# Altium PCB PCB_CardReader.pcbdoc
Units mil, origin at the board's own origin, x right, y up, seen from the top; angles counter-clockwise.
Board outline 4727.5 x 3025 mil, 2 copper layers (Top Layer, Bottom Layer); 25 components, 56 nets, 147 pads, 23 vias.
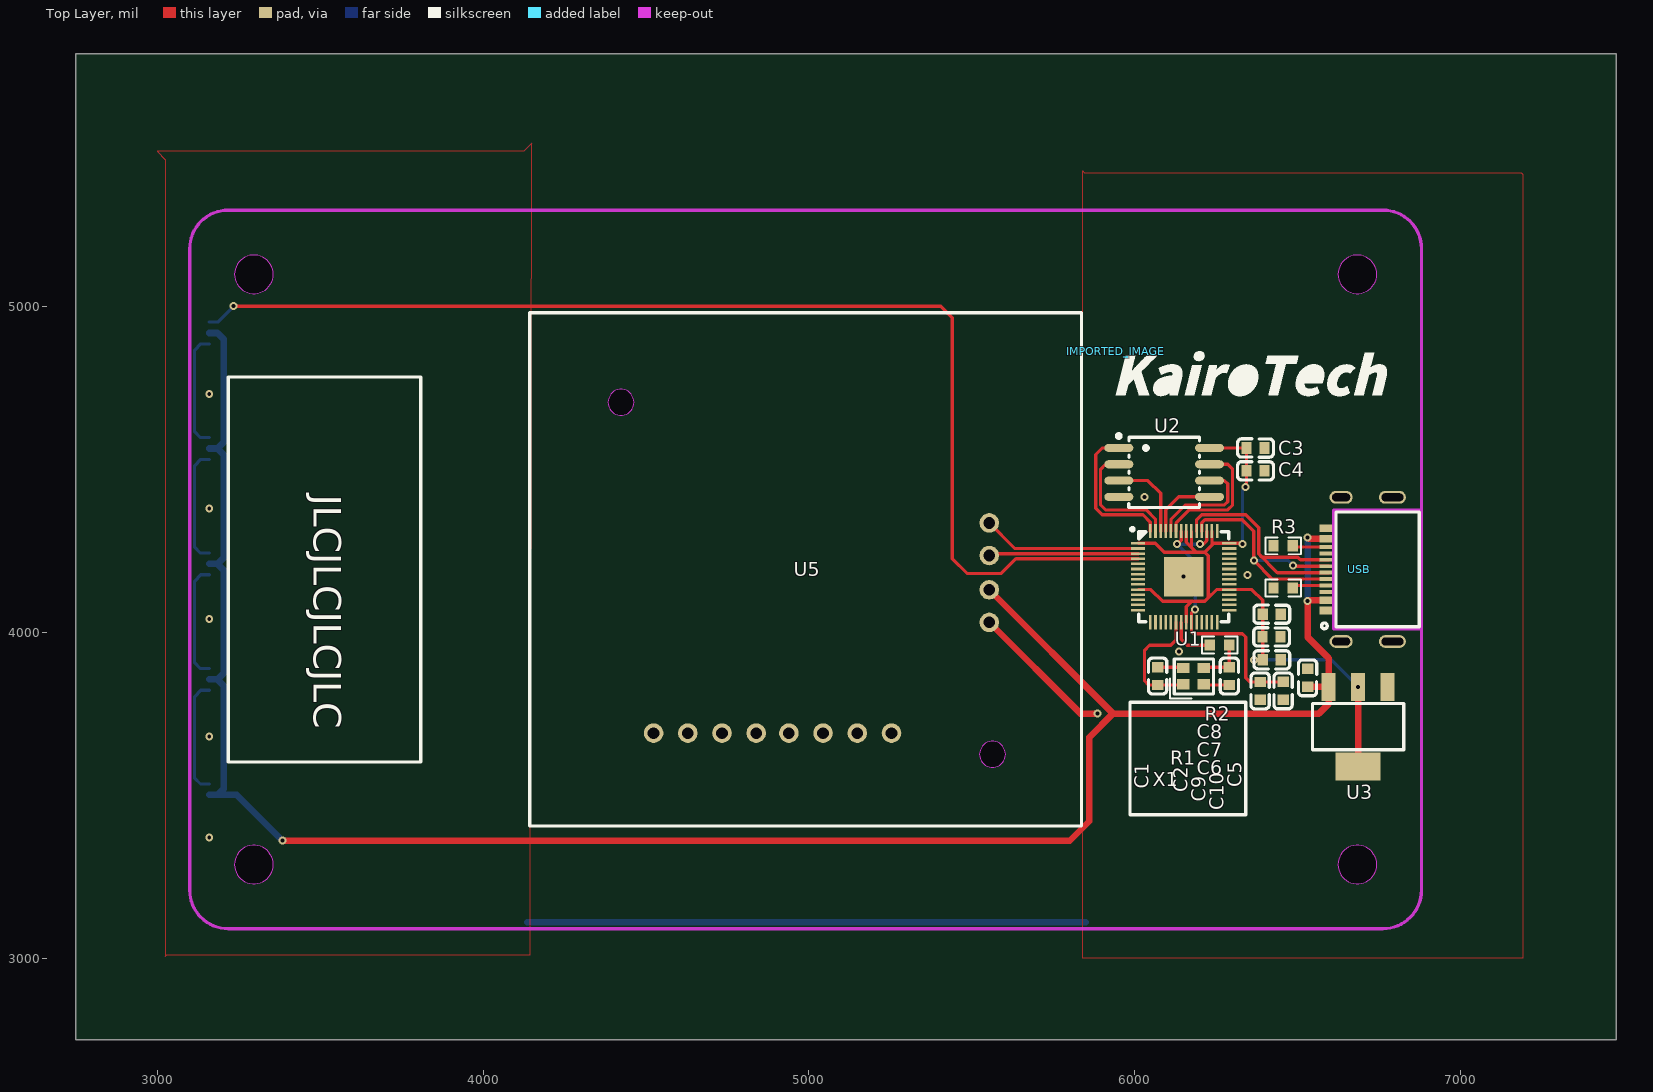
[diagram p0: Top Layer view]
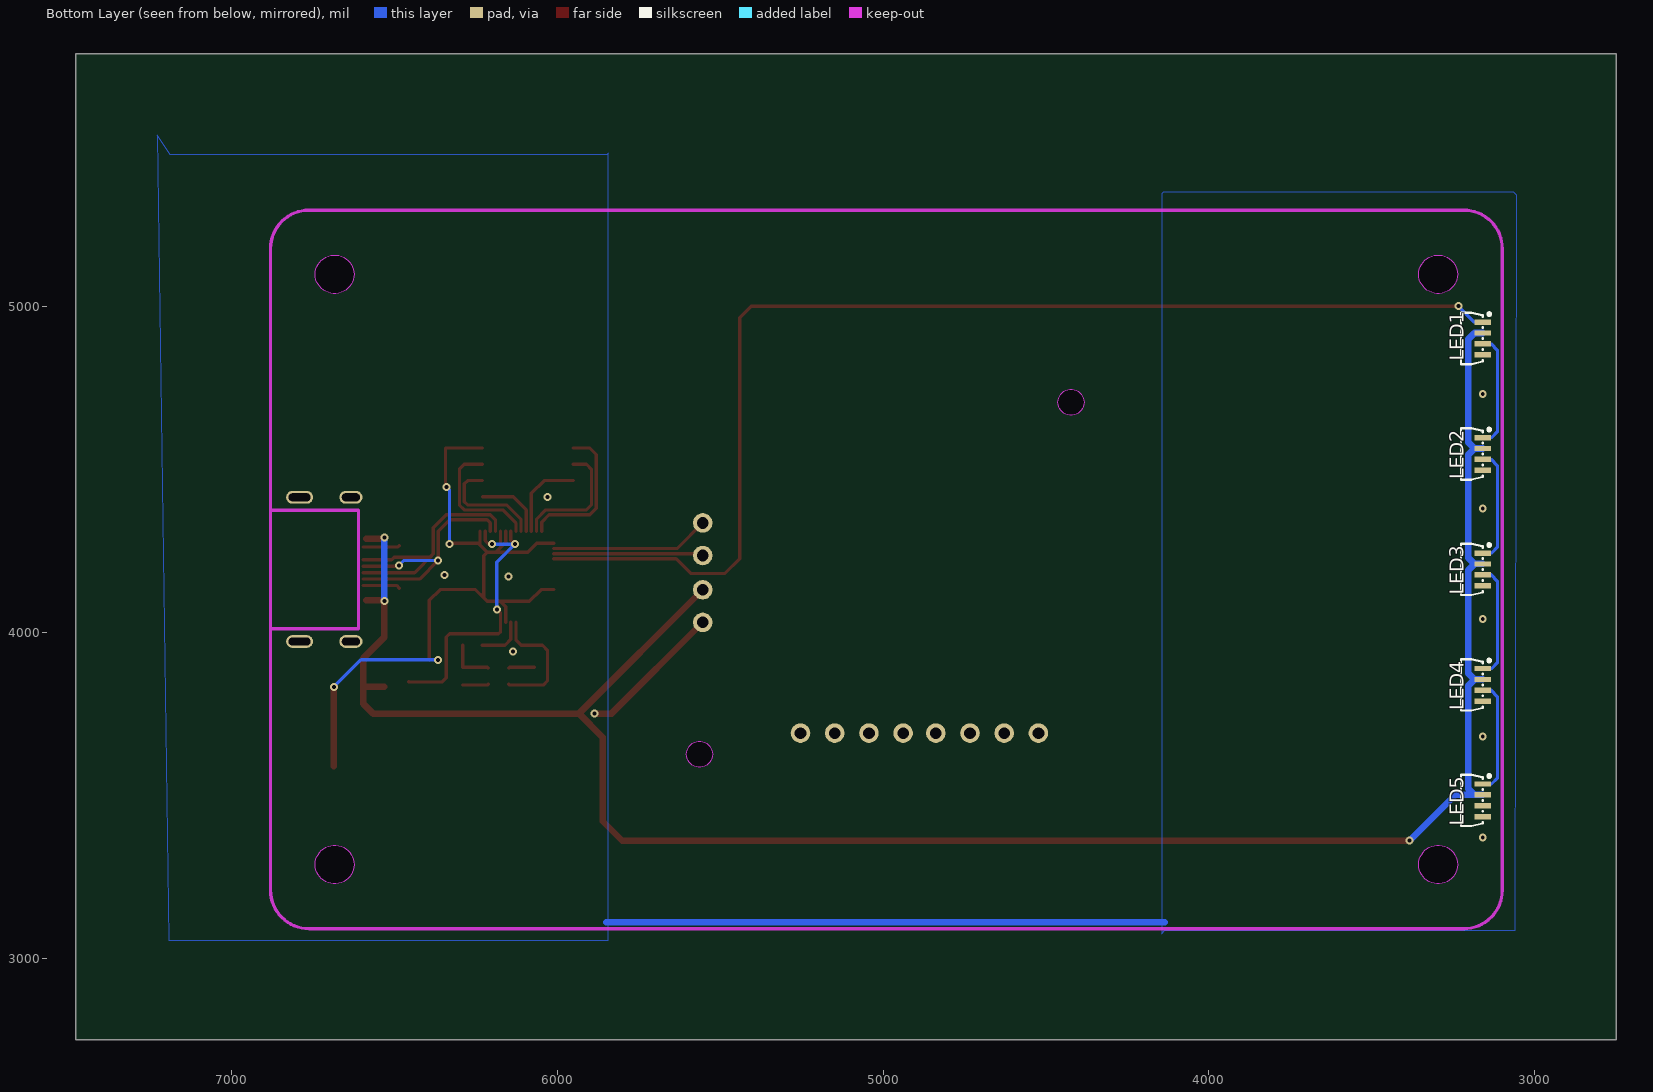
[diagram p1: Bottom Layer view, seen from below]

## Layer stack, top to bottom
Top Layer: signal copper (thickness not stored)
Dielectric: dielectric 12.6, FR-4, Dk 4.8
Bottom Layer: signal copper (thickness not stored)

## Board outline
7477.5,2750 2750,2750 2750,5775 7477.5,5775
cut-out: 3356.53,5097.87 ccw(c3296.85,5097.32) 3237.17,5097.87 ccw(c3296.85,5098.42)
cut-out: 6742.35,5097.87 ccw(c6682.67,5097.32) 6622.99,5097.87 ccw(c6682.67,5098.42)
cut-out: 3356.53,3286.85 ccw(c3296.85,3286.3) 3237.17,3286.85 ccw(c3296.85,3287.4)
cut-out: 6742.35,3286.85 ccw(c6682.67,3286.3) 6622.99,3286.85 ccw(c6682.67,3287.4)

## Components (designator, comment, footprint, x,y, rotation, side; value= is the part's Value field where it differs from the comment)
C1 "12pF" C0603 6070,3865 r270 top
C2 "12pF" C0603 6290,3865 r270 top
C3 "100nF" C0603 6370,4565 r180 top
C4 "100nF" C0603 6370,4495 r180 top
C5 "0.1u" C0603 6530,3860 r90 top
C6 "100nF" C0603 6420,3915 r180 top
C7 "100nF" C0603 6419.39,3985.21 r180 top
C8 "100nF" C0603 6420,4055 r180 top
C9 "100nF" C0603 6384.6,3819.7 r90 top
C10 "100nF" C0603 6455,3820 r90 top
IMPORTED_IMAGE "IMPORTED_IMAGE" IMPORTED_IMAGE 5942.04,4861.65 r0 top
LED1 "WS2812B-4020" LED-SMD_WS2812B-4020 3160,4901.02 r90 bottom
LED2 "WS2812B-4020" LED-SMD_WS2812B-4020 3160,4546.69 r90 bottom
LED3 "WS2812B-4020" LED-SMD_WS2812B-4020 3160,4192.36 r90 bottom
LED4 "WS2812B-4020" LED-SMD_WS2812B-4020 3160,3838.03 r90 bottom
LED5 "WS2812B-4020" LED-SMD_WS2812B-4020 3160,3483.7 r90 bottom
R1 "1k" R0603 6260,3960 r180 top
R2 "1k" R0603 6455,4135 r0 top
R3 "1k" R0603 6455,4265 r0 top
U1 "RP2040" LQFN-56_L7.0-W7.0-P0.4-EP 6150,4170 r0 top
U2 "W25Q32JVSSIQ_C2834491" SOIC-8_L5.2-W5.2-P1.27-LS7.9-BL 6090,4490 r270 top
U3 "AMS1117-5.0_C347223" SOT-223_L6.7-W3.5-P2.30-BR 6685,3710 r90 top
U5 "pn532" PN532 4143.3,3405 r0 top
USB "TYPE-610-1.6-T3" USB-C-SMD_TYPE-C-16P-610-1.6-T3 6687.95,4192.36 r90 top
X1 "12MHz" CRYSTAL-SMD_4P-L2.5-W2.0-BL_XTAL12MHZ 6180,3865 r0 top

## Footprints (in the part's own frame and the unit in brackets; to place one, negate y for a bottom-side part, rotate by r counter-clockwise, add the part's x,y. Pads: shape width x height; smd on the part's side, far side on the other; paste and mask are expansions set on the pad)
C0603 [mm]
  rect 0.8x0.9 smd: 1(-0.7,0) 2(0.7,0)
  silkscreen extent -1.41,-0.71 1.39,0.72
CRYSTAL-SMD_4P-L2.5-W2.0-BL_XTAL12MHZ [mm]
  rect 1x0.8 smd: 1(-0.8,-0.625) 2(0.8,-0.625) 3(0.8,0.625) 4(-0.8,0.625)
  silkscreen extent -1.82,-1.73 1.55,1.33
IMPORTED_IMAGE [mil]
  silkscreen extent 0,-138 832,0
LED-SMD_WS2812B-4020 [mm]
  rect 0.42x1.3 smd: 1(1.275,0) 2(0.425,0) 3(-0.425,0) 4(-1.275,0)
  silkscreen extent -2,-0.6 2,1.7
LQFN-56_L7.0-W7.0-P0.4-EP [mm]
  rect 1.1x0.2 smd: 1(-3.55,2.6) 2(-3.55,2.2) 3(-3.55,1.8) 4(-3.55,1.4) 5(-3.55,1) 6(-3.55,0.6) 7(-3.55,0.2) 8(-3.55,-0.2) 9(-3.55,-0.6) 10(-3.55,-1) 11(-3.55,-1.4) 12(-3.55,-1.8) 13(-3.55,-2.2) 14(-3.55,-2.6) 29(3.55,-2.6) 30(3.55,-2.2) 31(3.55,-1.8) 32(3.55,-1.4) 33(3.55,-1) 34(3.55,-0.6) 35(3.55,-0.2) 36(3.55,0.2) 37(3.55,0.6) 38(3.55,1) 39(3.55,1.4) 40(3.55,1.8) 41(3.55,2.2) 42(3.55,2.6)
  rect 0.2x1.1 smd: 15(-2.6,-3.55) 16(-2.2,-3.55) 17(-1.8,-3.55) 18(-1.4,-3.55) 19(-1,-3.55) 20(-0.6,-3.55) 21(-0.2,-3.55) 22(0.2,-3.55) 23(0.6,-3.55) 24(1,-3.55) 25(1.4,-3.55) 26(1.8,-3.55) 27(2.2,-3.55) 28(2.6,-3.55) 43(2.6,3.55) 44(2.2,3.55) 45(1.8,3.55) 46(1.4,3.55) 47(1,3.55) 48(0.6,3.55) 49(0.2,3.55) 50(-0.2,3.55) 51(-0.6,3.55) 52(-1,3.55) 53(-1.4,3.55) 54(-1.8,3.55) 55(-2.2,3.55) 56(-2.6,3.55)
  rect 3.1x3.1 smd: 57(0,0)
  silkscreen extent -4.13,-3.5 3.5,3.83
PN532 [mil]
  round 60 hole 36: 1(1410,930) 2(1410,830) 3(1410,725) 4(1410,625) 5(1110,285) 6(1005,285) 7(900,285) 8(795,285) 9(695,285) 10(590,285) 11(485,285) 12(380,285)
  Multi-Layer board cut-out: 1460,220 1456.04,237.36 1444.94,251.27 1428.9,259 1411.1,259 1395.06,251.27 1383.96,237.36 1380,220 1380,220 1383.96,202.64 1395.06,188.73 1411.1,181 1428.9,181 1444.94,188.73 1456.04,202.64 1460,220
  Multi-Layer board cut-out: 320,1300 316.04,1317.36 304.94,1331.27 288.9,1339 271.1,1339 255.06,1331.27 243.96,1317.36 240,1300 240,1300 243.96,1282.64 255.06,1268.73 271.1,1261 288.9,1261 304.94,1268.73 316.04,1282.64 320,1300
  Multi-Layer keep-out region: 1460,220 1456.04,237.36 1444.94,251.27 1428.9,259 1411.1,259 1395.06,251.27 1383.96,237.36 1380,220 1380,220 1383.96,202.64 1395.06,188.73 1411.1,181 1428.9,181 1444.94,188.73 1456.04,202.64 1460,220
  Multi-Layer keep-out region: 320,1300 316.04,1317.36 304.94,1331.27 288.9,1339 271.1,1339 255.06,1331.27 243.96,1317.36 240,1300 240,1300 243.96,1282.64 255.06,1268.73 271.1,1261 288.9,1261 304.94,1268.73 316.04,1282.64 320,1300
  silkscreen extent 0,0 1693,1575
R0603 [mil]
  rect 31.75x34.02 smd: 1(-29.66,0) 2(29.66,0)
  silkscreen extent -55,-26 55,26
SOIC-8_L5.2-W5.2-P1.27-LS7.9-BL [mm]
  oval 0.63x2.25 smd: 1(-1.905,-3.53) 2(-0.635,-3.53) 3(0.635,-3.53) 4(1.905,-3.53) 5(1.905,3.53) 6(0.635,3.53) 7(-0.635,3.53) 8(-1.905,3.53)
  silkscreen extent -2.99,-3.69 2.74,2.75
SOT-223_L6.7-W3.5-P2.30-BR [mm]
  rect 2.2x1.1 smd: 1(3.099,-2.3) 2(3.099,0) 3(3.099,2.3)
  rect 2.2x3.5 smd: 4(-3.099,0)
  silkscreen extent -1.8,-3.55 1.8,3.55
USB-C-SMD_TYPE-C-16P-610-1.6-T3 [mm]
  oval 1x2.1 hole 0.6 slot 1.7 at 90 deg: 0(5.62,-2.6) 2(-5.62,-2.6)
  oval 1x1.8 hole 0.6 slot 1.4 at 90 deg copper offset 0,0: 1(5.62,1.4) 3(-5.62,1.4)
  rect 0.6x1 smd: A1B12(-3.2,2.6) A4B9(-2.4,2.6) B1A12(3.2,2.6) B4A9(2.4,2.6)
  rect 0.3x1 smd: A5(-1.25,2.6) A6(-0.25,2.6) A7(0.25,2.6) A8(1.25,2.6) B5(1.75,2.6) B6(0.75,2.6) B7(-0.75,2.6) B8(-1.75,2.6)
  Board Outline Layer lines w0.254: -4.62,2 -4.62,-4.866 -4.62,2 ; -4.62,2 4.62,2 ; -4.62,2 4.62,2 ; 4.62,2 4.62,-4.782 4.62,2
  silkscreen extent -4.62,-4.7 4.47,2.92

## Via types
v1: diameter 24.41, hole 12.2, Top Layer to Bottom Layer, 23 vias

## Nets (pads, with @x,y where several pads share a name; then routed paths per layer and width w, separated by ;. In a path a pad name is that pad's centre, name@x,y a point inside that pad or via, vN(x,y) a via of type N, cw(c..) or ccw(c..) an arc to the next point about the centre after c; other vN are vias at no path point)
1V1: C9.2 C10.2 U1.23 U1.45 U1.50 | length 883.6
  Top Layer w10: v1(6130,4270) 6142.12,4282.12 U1.50 ; v1(6185,4070) 6173.62,4058.62 U1.23 6173.62,4001.38 6180,3995 6330,3995 6340,3985 6340,3860 6352.74,3847.26 C9.2 ; v1(6200,4270) 6210,4270 6220.86,4280.86 U1.45 ; C9.2 C10.2
  Bottom Layer w10: v1(6185,4070) 6185,4215 v1(6130,4270) v1(6200,4270)
3V3: C3.2 C4.2 C6.2 C7.2 C8.2 U1.1 U1.10 U1.22 U1.33 U1.42 U1.44 U1.48 U1.49 U2.8 U3.2 U3.4 | length 2402.1
  Top Layer w10: U1.10 6049.4,4130.6 6085,4095 6175,4095 ; U1.1 6062.6,4272.4 6090,4245 6215,4245 ; U1.22 6157.9,4077.9 6175,4095 ; U1.49 6157.9,4276.1 6189,4245 6173.6,4260.4 U1.48 ; U2.8 C3.2 C4.2 6342.45,4447.45 v1(6340,4445) ; U1.44 6236.61,4266.61 6215,4245 ; v1(6330,4270) 6327.64,4272.36 U1.42 6242.36,4272.36 6215,4245 ; C6.2 C8.2 6392.44,4097.56 6359.37,4130.63 U1.33 6250.63,4130.63 6225,4105 ; 6175,4095 6215,4095 6225,4105 ; 6215,4245 6225,4235 6225,4105
  Top Layer w20: U3.4 v1(6685,3832)
  Bottom Layer w10: v1(6330,4270) 6330,4435 v1(6340,4445) ; v1(6365,3915) 6602,3915 v1(6685,3832)
ADC_ACDD: U1.43
GND: C1.1 C2.2 C3.1 C4.1 C5.2 C6.1 C7.1 C8.1 C9.1 C10.1 LED1.4 LED2.4 LED3.4 LED4.4 LED5.4 R2.1 R3.1 U1.57 U2.4 U3.1 U5.4 USB.0 USB.1 USB.2 USB.3 USB.A1B12 USB.B1A12 X1.2 X1.4 | length 2322.1
  Top Layer w10: C1.1 6145.56,3892.55 X1.4 ; X1.2 6214.44,3837.44 C2.2
  Top Layer w20: U5.4 5833.3,3750 v1(5885,3750)
  Bottom Layer w20: 4135,3110 5850,3110
  other v1: 3160,3370 3160,3680 6135,3940 3160,4040 6150,4170 6345,4175 3160,4380 6030,4415 3160,4730
GPIO3: U1.5
GPIO4: U1.6
GPIO5: U1.7
GPIO6: U1.8
GPIO7: U1.9
GPIO8: U1.11
GPIO9: U1.12
GPIO10: U1.13
GPIO11: U1.14
GPIO12: U1.15
GPIO13: U1.16
GPIO14: U1.17
GPIO15: U1.18
GPIO16: U1.27
GPIO17: U1.28
GPIO18: U1.29
GPIO19: U1.30
GPIO20: U1.31
GPIO21: U1.32
GPIO22: U1.34
GPIO23: U1.35
GPIO24: U1.36
GPIO25: U1.37
GPIO26_ADC0: U1.38
GPIO27_ADC1: U1.39
GPIO28_ADC2: U1.40
GPIO29_ADC3: U1.41
LED: LED1.1 U1.4 | length 3662.2
  Top Layer w10: v1(3235,5000) 4680,5000 5405,5000 5440,4965 5440,4225 5485,4180 5500,4180 5590,4180 5635.1,4225.1 U1.4
  Bottom Layer w10: LED1.1 3186.22,4951.22 v1(3235,5000)
LED1_3: LED1.3 LED2.1 | length 355.5
  Bottom Layer w10: LED2.1 3133.1,4596.9 3115,4615 3115,4850 3115,4865 3134.3,4884.3 LED1.3
LED2_3: LED2.3 LED3.1 | length 355.5
  Bottom Layer w10: LED3.1 3133.1,4242.57 3115,4260.67 3115,4495.67 3115,4510.67 3134.3,4529.97 LED2.3
LED3_3: LED3.3 LED4.1 | length 355.5
  Bottom Layer w10: LED4.1 3133.1,3888.24 3115,3906.34 3115,4141.34 3115,4156.34 3134.3,4175.64 LED3.3
LED4_3: LED4.3 LED5.1 | length 355.5
  Bottom Layer w10: LED5.1 3133.1,3533.91 3115,3552.01 3115,3787.01 3115,3802.01 3134.3,3821.31 LED4.3
QSPI_SCLK: U1.52 U2.6 | length 347.9
  Top Layer w10: U1.52 6110.6,4345.6 6155,4390 6275,4390 6285,4400 6285,4455 6275,4465 U2.6
QSPI_SD0: U1.53 U2.5 | length 215.8
  Top Layer w10: U1.53 6094.88,4374.88 6135,4415 U2.5
QSPI_SD1: U1.55 U2.2 | length 395.4
  Top Layer w10: U2.2 5910,4515 5895,4500 5895,4390 5910,4375 6035,4375 6063.4,4346.6 U1.55
QSPI_SD2: U1.54 U2.3 | length 260.4
  Top Layer w10: U2.3 6040,4465 6079.13,4425.87 U1.54
QSPI_SD3: U1.51 U2.7 | length 408.8
  Top Layer w10: U1.51 6126.4,4335 6166.4,4375 6285,4375 6300,4390 6300,4500 6285,4515 U2.7
QSPI_SS: U1.56 U2.1 | length 457.1
  Top Layer w10: U2.1 5900,4565 5880,4545 5880,4380 5900,4360 6025,4360 6047.6,4337.4 U1.56
RUN: U1.26
SWCLK: U1.24
SWD: U1.25
UART0_RX: U1.3 U5.2 | length 459.4
  Top Layer w10: U5.2 5559.16,4240.86 U1.3
UART0_TX: U1.2 U5.1 | length 489.4
  Top Layer w10: U5.1 5631.69,4256.61 U1.2
USB_A5: R2.2 USB.A5 | length 114.3
  Top Layer w10: R2.2 6492.8,4143.14 USB.A5@6595.54,4143.14
USB_B5: R3.2 USB.B5 | length 112.4
  Top Layer w10: R3.2 6488.41,4261.25 USB.B5@6595.54,4261.25
USB_D+: U1.47 USB.A6 USB.B6 | length 790.6
  Top Layer w10: U1.47 6189.4,4344.4 6205,4360 6340,4360 6380,4320 6380,4240 ; USB.B6@6595.5,4221.9 6508.1,4221.9 6500,4230 6390,4230 6380,4240 ; USB.A6@6595.54,4182.51 6437.49,4182.51 6380,4240
USB_D-: U1.46 USB.A7 USB.B7 | length 785.9
  Top Layer w10: U1.46 6205.1,4335 6215.1,4345 6330,4345 6365,4310 v1(6365,4220) 6422.18,4162.82 USB.B7@6595.54,4162.82 ; v1(6485,4205) 6487.81,4202.19 USB.A7@6595.54,4202.19
  Bottom Layer w10: v1(6365,4220) 6470,4220 v1(6485,4205)
VCC: C5.1 LED1.2 LED2.2 LED3.2 LED4.2 LED5.2 U3.3 U5.3 USB.A4B9 USB.B4A9 | length 6949.7
  Top Layer w20: v1(3385,3360) 5800,3360 5860,3420 5860,3676.7 5933.3,3750 ; U5.3 5933.3,3750 ; C5.1 U3.3 6594.4,3779.5 6565,3750 5933.3,3750 ; v1(6530,4290) 6533.15,4286.85 USB.B4A9 ; USB.A4B9 6532.87,4097.87 v1(6530,4095) 6530,3985 6594.45,3920.55 U3.3
  Bottom Layer w10: v1(6530,4095) v1(6530,4290)
  Bottom Layer w20: LED5.2 3185.4,3500.4 3205,3520 3205,3835 3185.2,3854.8 LED4.2 ; LED5.2 3244.57,3500.43 v1(3385,3360) ; LED4.2@3160,3854.73 3185.4,3854.73 3205,3874.33 3205,4189.33 3185.2,4209.13 LED3.2 ; LED3.2 3185.4,4209.06 3205,4228.66 3205,4543.66 3185.2,4563.46 LED2.2@3160,4563.46 ; LED2.2 3185.4,4563.39 3205,4582.99 3205,4897.99 3185.2,4917.79 LED1.2 ; v1(6530,4095) v1(6530,4290)
X1_3: C2.1 R1.1 X1.3 | length 147.1
  Top Layer w10: X1.3 6214.44,3892.55 C2.1 ; R1.1 C2.1
XIN: C1.2 U1.20 X1.1 | length 383.2
  Top Layer w10: C1.2 6042.6,3837.4 6030,3850 6030,3945 6045,3960 6110,3960 6126.4,3976.4 U1.20 ; C1.2 6145.56,3837.44 X1.1
XOUT: R1.2 U1.21 | length 148
  Top Layer w10: U1.21 6142.12,3977.88 6160,3960 R1.2
"": LED5.3 U1.19 U5.5 U5.6 U5.7 U5.8 U5.9 U5.10 U5.11 U5.12 USB.A8 USB.B8

## Polygon pours and split planes (outlines as drawn)
GND on Top Layer (solid, remove dead copper, pour order 0): 5840,5415 5845,5410 7185,5410 7190,5405 7190,3000 5840,3000
GND on Bottom Layer (solid, remove dead copper, pour order 1): 5842.5,5470 5847.5,5465 7187.5,5465 7227.5,5525 7192.5,3055 5842.5,3055
GND on Bottom Layer (solid, remove dead copper, pour order 2): 3055,5340 3065,5350 4140,5350 4145,5345 4145,3075 4135,3085 3060,3085
GND on Top Layer (solid, remove dead copper, pour order 3): 4150,5500 4125,5475 3000,5475 3025,5450 3025,3005 3030,3010 4145,3010

## Keep-outs
Board Outline Layer:
  lines w10 net "": 3100,3208.11 ccw(c3218.11,3208.11) 3218.11,3090 6761.41,3090 ccw(c6761.41,3208.11) 6879.52,3208.11 6879.52,5176.61 ccw(c6761.41,5176.61) 6761.41,5294.72 3218.11,5294.72 ccw(c3218.11,5176.61) 3100,5176.61 3100,3208.11
Multi-Layer:
  region net "": 3356.53,5097.87 ccw(c3296.85,5097.32) 3237.17,5097.87 ccw(c3296.85,5098.42)
  region net "": 6742.35,5097.87 ccw(c6682.67,5097.32) 6622.99,5097.87 ccw(c6682.67,5098.42)
  region net "": 3356.53,3286.85 ccw(c3296.85,3286.3) 3237.17,3286.85 ccw(c3296.85,3287.4)
  region net "": 6742.35,3286.85 ccw(c6682.67,3286.3) 6622.99,3286.85 ccw(c6682.67,3287.4)

## Silkscreen, mask and mechanical layers (free items; w line width, h text height)
Top Silkscreen Layer:
  lines w10 net "": 3218.11,3601.81 3808.66,3601.81 3808.66,4782.91 3218.11,4782.91 3218.11,3601.81 ; 5985,3440 6340,3440 6340,3785 5985,3785 5985,3440
  text "JLCJLCJLCJLC" at 3481.3,4421.89 h85.62 r270
Mechanical Layer:
  circle w1 net "": c3296.85,5097.87 r59.69
  circle w1 net "": c6682.67,5097.87 r59.69
  circle w1 net "": c3296.85,3286.85 r59.69
  circle w1 net "": c6682.67,3286.85 r59.69